# Altium PCB FEV-60_IO_Board.PcbDoc
Units mil, origin at the board's own origin, x right, y up, seen from the top; angles counter-clockwise.
Board outline 3285 x 2200 mil, 2 copper layers (Top Layer, Bottom Layer); 74 components, 86 nets, 279 pads, 88 vias.
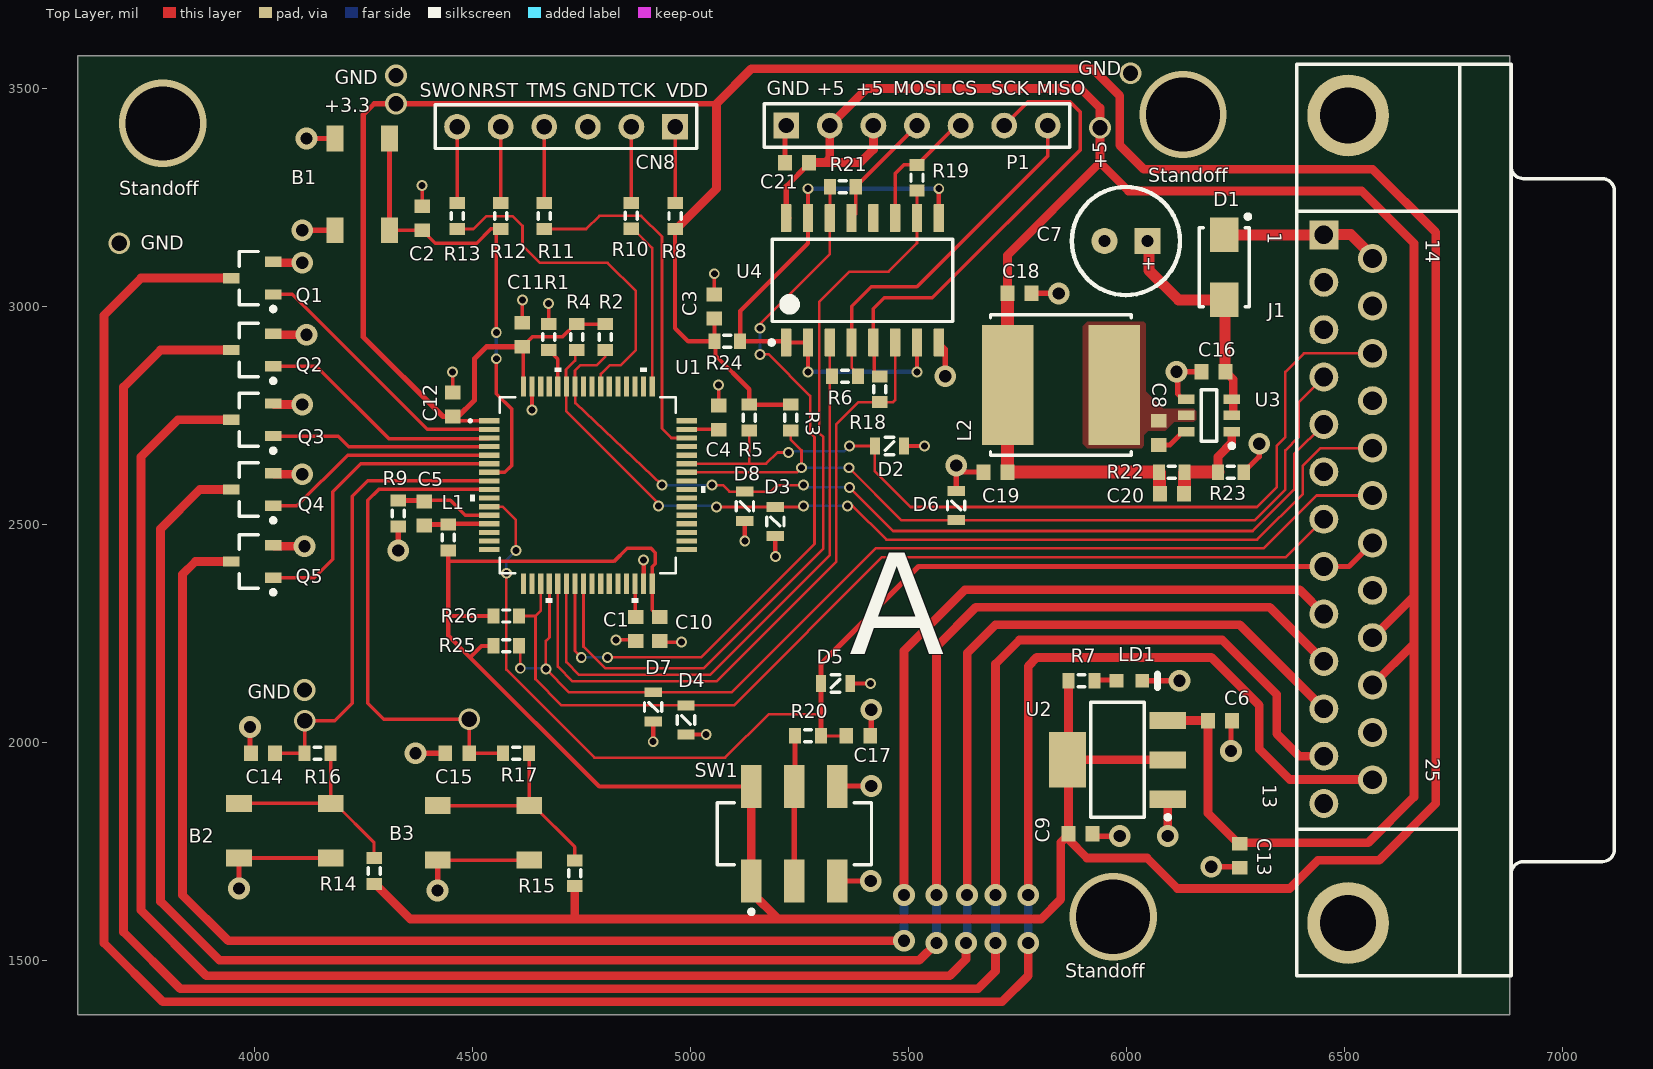
[diagram p0: Top Layer view]
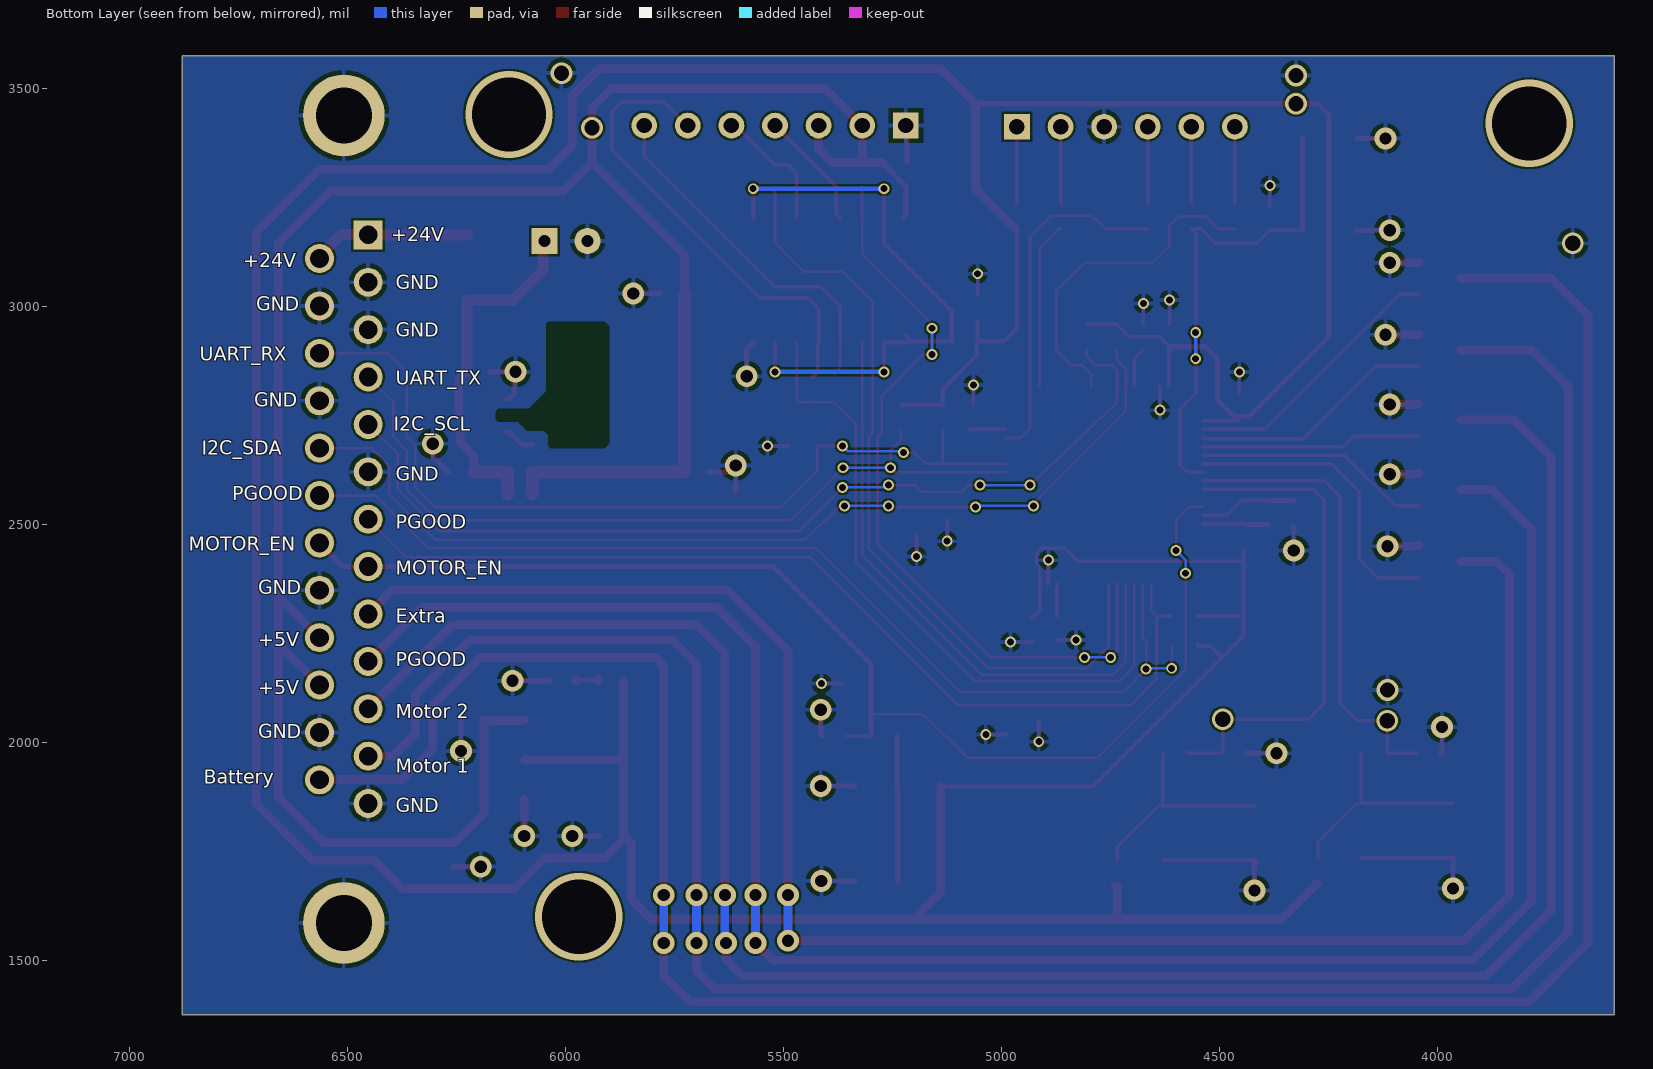
[diagram p1: Bottom Layer view, seen from below]

## Layer stack, top to bottom
Top Solder: solder mask 0.4, Solder Resist, Dk 3.5
Top Layer: signal copper 1.4
Dielectric 1: dielectric 12.6, FR-4, Dk 4.8
Bottom Layer: signal copper 1.4
Bottom Solder: solder mask 0.4, Solder Resist, Dk 3.5

## Board outline
3595,1375 3595,3575 6880,3575 6880,1375

## Design rules (kind name [scope] priority, off if disabled: settings)
Clearance [All] p1: gap=5 ignorepadtopadclearanceinfootprint=FALSE
HoleSize [All] p1: absolutevalues=TRUE maxlimit=180 minlimit=1 maxpercent=80.000 minpercent=20.000
MinimumSolderMaskSliver [All] p1: minsoldermaskwidth=5
PolygonConnect PolygonConnect_1 [All vs IsNamedPolygon('NETC8_1_L01_P004')] p1: connectstyle=Direct reliefconductorwidth=10 reliefentries=4 polygonreliefangle="90 Angle" airgapwidth=10
PolygonConnect [All] p2: connectstyle=Relief reliefconductorwidth=10 reliefentries=4 polygonreliefangle="90 Angle" airgapwidth=10
RoutingVias [All] p1: holewidth=28 width=50 viastyle="Through Hole" minholewidth=16 minwidth=25 maxholewidth=200 maxwidth=250
SilkToSilkClearance [All] p1: silktosilkclearance=4
SilkToSolderMaskClearance [IsPad] p1: minsilkscreentomaskgap=3 clearancetoexposedcopper=TRUE
SolderMaskExpansion [All] p1: expansion=4
Width [All] p1: maxlimit=30 minlimit=6 preferedwidth=10
26 further rules are at their usual default settings.

## Components (designator, comment, footprint, x,y, rotation, side; value= is the part's Value field where it differs from the comment)
B1 "TD-0341 [RESET/Black]" Button 4185,3175 r90 top
B2 "TD-0341 [RESET/Black]" Button 3965,1860 r0 top
B3 "TD-0341 [RESET/Black]" Button 4420.47,1855 r0 top
C1 "Cap Semi" 1608[0603] 4875,2260 r90 top value=4.7uF
C2 "Cap Semi" 1608[0603] 4385,3202.44 r270 top value=100nF
C3 "Cap Semi" 1608[0603] 5055,3000 r270 top value=22uF
C4 "Cap Semi" 1608[0603] 5065,2745 r270 top value=2.2uF
C5 "Cap Semi" 1608[0603] 4390,2525 r270 top value=10uF
C6 "Cap Semi" 1608[0603] 6215,2050 r180 top value=10uF
C7 "UVY1V101MED1TD" UVY1V101MED1TD 6030,3150 r180 top value=100uF
C8 "Cap Semi" 1608[0603] 6075,2710 r270 top value=100nF
C9 "Cap Semi" 1608[0603] 5895,1790 r180 top value=10uF
C10 "Cap Semi" 1608[0603] 4930,2260 r90 top value=22uF
C11 "Cap Semi" 1608[0603] 4615,2935 r270 top value=22uF
C12 "Cap Semi" 1608[0603] 4455,2775 r270 top value=22uF
C13 "Cap Semi" 1608[0603] 6260,1740 r90 top value=10uF
C14 "Cap Semi" 1608[0603] 4020,1975 r0 top value=0.1uF
C15 "Cap Semi" 1608[0603] 4465.47,1975 r0 top value=0.1uF
C16 "Cap Semi" 1608[0603] 6200,2850 r0 top value=4.7uF
C17 "Cap Semi" 1608[0603] 5385,2015 r180 top value=0.1uF
C18 "Cap Semi" 1608[0603] 5755,3030 r180 top value=10uF
C19 "Cap Semi" 1608[0603] 5700,2620 r0 top value=10uF
C20 "Cap Semi" 1608[0603] 6105,2570 r180 top value=47pF
C21 "Cap Semi" 1608[0603] 5245,3330 r0 top value=10uF
CN8 "Header 6X1" HDR1X6 4965,3412.26 r180 top
D1 "STPS2L30A" STPS2L30A 6225,3090 r270 top
D2 "SP1103C-01UTG" SP1103C-01UTG 5456.93,2680 r180 top
D3 "SP1103C-01UTG" SP1103C-01UTG 5195,2506.54 r90 top
D4 "SP1103C-01UTG" SP1103C-01UTG 4990,2051.54 r90 top
D5 "SP1103C-01UTG" SP1103C-01UTG 5333.46,2135 r180 top
D6 "SP1103C-01UTG" SP1103C-01UTG 5610,2543.46 r270 top
D7 "SP1103C-01UTG" SP1103C-01UTG 4915,2081.54 r90 top
D8 "SP1103C-01UTG" SP1103C-01UTG 5125,2541.54 r90 top
J1 "D Connector 25" DSUB1.385-2H25A 6883.11,2511.95 r270 top locked
L1 "Ferrite" J1-0603 4445,2470 r90 top
L2 "Inductor" 74404084100 5850,2820 r180 top value=10uH
LD1 "HSMS-C190" AVAG-HSMX-C190_V 6007.13,2141.22 r0 top
P1 "Header 7" HDR1X7 5220,3415 r0 top
Q1 "MOSFET-N" RK7002BMT116 3995,3065 r180 top
Q2 "MOSFET-N" RK7002BMT116 3995,2900 r180 top
Q3 "MOSFET-N" RK7002BMT116 3995,2740 r180 top
Q4 "MOSFET-N" RK7002BMT116 3995,2580 r180 top
Q5 "MOSFET-N" RK7002BMT116 3995,2415 r180 top
R1 "Res3" J1-0603 4675,2930 r270 top value=10K
R2 "Res3" J1-0603 4805,2930 r90 top value=10K
R3 "Res3" J1-0603 5230,2745 r90 top value=10K
R4 "Res3" J1-0603 4740,2930 r90 top value=10K
R5 "Res3" J1-0603 5135,2745 r90 top value=10K
R6 "Res3" J1-0603 5355,2840 r180 top value=0
R7 "Res3" J1-0603 5897.13,2141.22 r180 top value=1K
R8 "Res3" J1-0603 4965,3207.26 r270 top value=0
R9 "Res3" J1-0603 4330,2525 r90 top value=0
R10 "Res3" J1-0603 4865,3207.74 r270 top value=22
R11 "Res3" J1-0603 4665,3207.26 r270 top value=22
R12 "Res3" J1-0603 4565,3207.26 r270 top value=22
R13 "Res3" J1-0603 4465,3207.26 r270 top value=22
R14 "Res3" J1-0603 4275,1705 r270 top value=10K
R15 "Res3" J1-0603 4735,1700 r270 top value=10K
R16 "Res3" J1-0603 4145,1975 r0 top value=10K
R17 "Res3" J1-0603 4600.47,1975 r0 top value=10K
R18 "Res3" J1-0603 5435,2810 r270 top value=0
R19 "Res3" J1-0603 5520,3295 r270 top value=0
R20 "Res3" J1-0603 5270,2015 r0 top value=10K
R21 "Res3" J1-0603 5350,3275 r180 top value=0
R22 "Res3" J1-0603 6104.53,2620 r0 top value=158K
R23 "Res3" J1-0603 6240,2620 r0 top value=30.1K
R24 "Res3" J1-0603 5085,2920 r180 top value=0
R25 "Res3" J1-0603 4578,2222 r180 top value=10K
R26 "Res3" J1-0603 4578,2290 r180 top value=10K
SW1 "JS202011SCQN" CKCP-JS202011SCQN-6_V 5238.56,1790.49 r0 top
U1 "MCU_LQFP64" STM32F030R8 4765,2590 r0 top locked
U2 "LD1117S33TR" LD1117S33TR 5980,1960 r180 top
U3 "AP63301WU-7" AP63301WU-7 6190,2750 r180 top
U4 "CD40109BNSR" NS0016A_N 5395,3060 r90 top

## Footprints (in the part's own frame and the unit in brackets; to place one, negate y for a bottom-side part, rotate by r counter-clockwise, add the part's x,y. Pads: shape width x height; smd on the part's side, far side on the other; paste and mask are expansions set on the pad)
1608[0603] [mm] "Chip Capacitor, Body 1.6x0.8mm, IPC High Density"
  rect 0.8x0.9 smd: 1(-0.7,0) 2(0.7,0)
  body extent -0.87,-0.48 0.87,0.48, height 1.3
74404084100 [mm] "10µH Shielded Wirewound Inductor 3.3A 29mOhm Nonstandard"
  rect 3x7 smd: 1(-3.1,0) 2(3.1,0)
  silkscreen extent -4.1,-4.1 4.1,4.1, body extent -4.1,-4.1 4.1,4.1, height 4.2
AP63301WU-7 [mm] "Buck Switching Regulator IC Positive Adjustable 0.8V 1 Output 3A SOT-23-6 Thin, TSOT-23-6"
  rect 0.95x0.55 smd: 1(-1.325,0.95) 2(-1.325,0) 3(-1.325,-0.95) 4(1.325,-0.95) 5(1.325,0) 6(1.325,0.95)
  silkscreen extent -1.45,-1.5 0.45,1.9, body extent -1.4,-1.5 1.4,1.5, height 1.1
AVAG-HSMX-C190_V [mm] "SMD, 2-Leads, Body 1.6x0.8mm, Height 0.9mm"
  rect 0.8x0.8 smd: 1(-0.75,0) 2(0.75,0)
  silkscreen extent 1.65,-0.4 1.65,0.4, body extent -0.8,-0.4 0.8,0.4, height 0.9
Button [mm]
  rect 1.5x1 smd: 1(0,0) 2(0,-3.175) 3(5.334,-3.175) 4(5.334,0)
CKCP-JS202011SCQN-6_V [mm] "SMD, 6-Leads, Body 9x3.6mm, Pitch 2.5mm"
  rect 1.2x2.5 smd: 1(-2.5,-2.75) 2(0,-2.75) 3(2.5,-2.75) 4(-2.5,2.75) 5(0,2.75) 6(2.5,2.75)
  silkscreen extent -4.5,-4.67 4.5,1.8, body extent -4.5,-1.8 4.5,1.8, height 5.5
DSUB1.385-2H25A [mm] "Connector; D Subminiature; 25 Position; Right Angle; Pitch 1.385 mm"
  rect 1.69x1.69 hole 1.09: 1(-16.566,-10.92)
  round 1.69 hole 1.09: 2(-13.805,-10.92) 3(-11.044,-10.92) 4(-8.283,-10.92) 5(-5.522,-10.92) 6(-2.761,-10.92) 7(0,-10.92) 8(2.761,-10.92) 9(5.522,-10.92) 10(8.283,-10.92) 11(11.044,-10.92) 12(13.805,-10.92) 13(16.566,-10.92) 14(-15.185,-8.08) 15(-12.424,-8.08) 16(-9.663,-8.08) 17(-6.902,-8.08) 18(-4.141,-8.08) 19(-1.38,-8.08) 20(1.381,-8.08) 21(4.142,-8.08) 22(6.903,-8.08) 23(9.664,-8.08) 24(12.425,-8.08) 25(15.186,-8.08)
  round 4.76 hole 3.26: 26(-23.526,-9.5) 27(23.526,-9.5)
  silkscreen extent -26.5,-12.5 26.6,6
HDR1X6 [mm] "Connector; Header; 6 Position"
  rect 1.5x1.5 hole 0.9: 1(0,0)
  round 1.5 hole 0.9: 2(2.54,0) 3(5.08,0) 4(7.62,0) 5(10.16,0) 6(12.7,0)
  silkscreen extent -1.27,-1.27 13.97,1.27
HDR1X7 [mm] "Connector; Header; 7 Position"
  rect 1.5x1.5 hole 0.9: 1(0,0)
  round 1.5 hole 0.9: 2(2.54,0) 3(5.08,0) 4(7.62,0) 5(10.16,0) 6(12.7,0) 7(15.24,0)
  silkscreen extent -1.27,-1.27 16.51,1.27
J1-0603 [mm] "Chip Resistor, Body 1.6x0.8mm, IPC High Density"
  rect 0.7x0.9 smd: 1(-0.75,0) 2(0.75,0)
  silkscreen extent -0.2,-0.35 0.2,0.35, body extent -0.85,-0.48 0.85,0.48, height 0.9
LD1117S33TR [mm] "SOT223, LDO 3.3V Converter"
  rect 2.15x1 smd: 1(-2.925,2.3) 2(-2.925,0) 3(-2.925,-2.3)
  rect 2.15x3.25 smd: 4(2.925,0)
  silkscreen extent -3.05,-3.35 1.55,3.47, body extent -3.5,-3.35 3.5,3.35, height 1.8
NS0016A_N [mm] "SOIC,16-Leads,Body 10.5x5.6mm,Pitch 1.27mm,IPC Medium Density"
  rrect17% 1.65x0.6 smd: 1(-3.625,4.445) 2(-3.625,3.175) 3(-3.625,1.905) 4(-3.625,0.635) 5(-3.625,-0.635) 6(-3.625,-1.905) 7(-3.625,-3.175) 8(-3.625,-4.445) 9(3.625,-4.445) 10(3.625,-3.175) 11(3.625,-1.905) 12(3.625,-0.635) 13(3.625,0.635) 14(3.625,1.905) 15(3.625,3.175) 16(3.625,4.445)
  silkscreen extent -3.75,-5.25 2.4,5.42, body extent -2.8,-5.25 2.8,5.25, height 2
RK7002BMT116 [mm] "N-Channel 60V 250mA, Pitch 0.95mm, IPC Medium Density"
  rect 0.95x0.6 smd: 1(1.225,0) 2(-1.225,0.95) 3(-1.225,-0.95)
  silkscreen extent -1.35,-1.55 0.75,1.92, body extent -1.3,-1.55 1.3,1.55, height 1.1
SP1103C-01UTG [mm]
  rect 0.58x1 smd: 1(-0.85,0) 2(0.85,0)
  silkscreen extent -0.25,-0.51 0.25,0.51
STM32F030R8 [mil]
  rect 47x12 smd: 1(-226.38,147.64) 2(-226.38,127.95) 3(-226.38,108.27) 4(-226.38,88.58) 5(-226.38,68.9) 6(-226.38,49.21) 7(-226.38,29.53) 8(-226.38,9.84) 9(-226.38,-9.84) 10(-226.38,-29.53) 11(-226.38,-49.21) 12(-226.38,-68.9) 13(-226.38,-88.58) 14(-226.38,-108.27) 15(-226.38,-127.95) 16(-226.38,-147.64) 33(226.38,-147.64) 34(226.38,-127.95) 35(226.38,-108.27) 36(226.38,-88.58) 37(226.38,-68.9) 38(226.38,-49.21) 39(226.38,-29.53) 40(226.38,-9.84) 41(226.38,9.84) 42(226.38,29.53) 43(226.38,49.21) 44(226.38,68.9) 45(226.38,88.58) 46(226.38,108.27) 47(226.38,127.95) 48(226.38,147.64)
  rect 12x47 smd: 17(-147.64,-226.38) 18(-127.95,-226.38) 19(-108.27,-226.38) 20(-88.58,-226.38) 21(-68.9,-226.38) 22(-49.21,-226.38) 23(-29.53,-226.38) 24(-9.84,-226.38) 25(9.84,-226.38) 26(29.53,-226.38) 27(49.21,-226.38) 28(68.9,-226.38) 29(88.58,-226.38) 30(108.27,-226.38) 31(127.95,-226.38) 32(147.64,-226.38) 49(147.64,226.38) 50(127.95,226.38) 51(108.27,226.38) 52(88.58,226.38) 53(68.9,226.38) 54(49.21,226.38) 55(29.53,226.38) 56(9.84,226.38) 57(-9.84,226.38) 58(-29.53,226.38) 59(-49.21,226.38) 60(-68.9,226.38) 61(-88.58,226.38) 62(-108.27,226.38) 63(-127.95,226.38) 64(-147.64,226.38)
  silkscreen extent -273,-270 270,270, body extent -236,-236 236,236, height 63
STPS2L30A [mm] "SODFL, Shottkey Diode"
  rect 2x1.65 smd: 1(-1.9,0) 2(1.9,0)
  silkscreen extent -3.07,-1.45 2.3,1.5, body extent -2.54,-1.45 2.54,1.45, height 2.45
UVY1V101MED1TD [mil] "Radial Cap from Nichicon"
  rect 60x60 hole 28: 1(-18.43,0)
  round 60 hole 28: 2(80,0)
  silkscreen extent -93,-124 155,124

## Part data
B1 B2 B3: library part "SW PUSHBUTTON", "SE PUSHBUTTON"
C1 C2 C3 C4 C5 C6 C8 C9 C10 C11 C12 C13 C14 C15 C16 C17 C18 C19 C20 C21: "Capacitor (Semiconductor SIM Model)", LatestRevisionDate=29-May-2009, LatestRevisionNote="IPC-7351 Footprint Added.", PackageDescription="Chip Capacitor", PackageReference=C1206, Published=8-Jun-2000, Publisher="Altium Limited"
C7: "Polarized Capacitor (Axial)", LatestRevisionDate=17-Jul-2002, LatestRevisionNote="Re-released for DXP Platform.", PackageDescription="Polarized Capacitor; 2 Leads", PackageReference=POLAR0.8, Published=8-Jun-2000, Publisher="Altium Limited"
CN8: "Header, 6-Pin, Single row", LatestRevisionDate=17-Jul-2002, LatestRevisionNote="Re-released for DXP Platform.", Publisher="Altium Limited"
D1: Manuf_1=STM, Manuf_Part_1=BAT60JFILM, Distrib=ST, ECCN_US/EU=EAR99/NEC, Order=BAT60JFILM, Provided=ST, Revision="July-2002: Re-released for DXP Platform."
D2 D3 D4 D5 D6 D7 D8: "9V (Typ) Clamp 80A (8/20µs) Ipp Tvs Diode Surface Mount 2-DFN (1.6x1)", Manuf="Littelfuse Inc.", Package=0603/2-DFN, Distrib=Digi-Key, Manuf_Part_Num=SP1103C-01UTG, Order=F10154CT-ND, Purchase Link=https://www.digikey.com/product-detail/en/littelfuse-inc/SP1103C-01UTG/F10154CT-ND/7402659
J1: "Receptacle Assembly, 25 Position, Right Angle", PackageDocument=U, DatasheetDocument=19-Mar-1999, Gender=Receptacle, LatestRevisionDate=17-Jul-2002, LatestRevisionNote="Re-released for DXP Platform.", Orientation="Right Angle", PackageReference=787202, Positions=25, Published=15-Jun-2001, Publisher="Altium Limited"
L1: library part Res3, "Resistor", LatestRevisionDate=29-May-2009, LatestRevisionNote="IPC-7351 Footprint Added.", PackageDescription="Chip Resistor", PackageReference=J1-0603, Published=8-Jun-2000, Publisher="Altium Limited"
LD1: library part CMP-2000-06427-1, "LED Uni-Color Red, 52 mW, 20 mA, -40 to 85 degC, 2-Pin SMD, RoHS, Tape and Reel", Emitting Color=Red, Forward Current=25mA, Forward Voltage=2.6V, Manufacturer=Avago, Operating Temperature Classification=Industrial, Operating Temp Range=-40Cto85C, Package Description="2-Pin Surface Mount Device, Body 1.6 x 0.8 mm, Height 0.9 mm", Package Reference=HSMX-C190, Package Type=ChipLed, Power Dissipation=52W, Reverse Voltage=5V, Test Current (It)=20mA, Chip Material=GaP, Datasheet URL=http://docs.avagotech.com/docs/AV02-0551EN, Datasheet Version=03/2012, DELETED=Compliant, Dominant Wave Length=626nm, High Brightness=No, Lens Dimensions=1x0.8x0.5mm, Lens Type=ColorlessDiffused, Luminous Intensity=10mcd, Lum Intensity=10mcd, Main Category=ChipLED, Manufacturer URL=http://www.avagotech.com/, Mounting=SurfaceMount, Mounting Technology=SurfaceMount, Number of  Elements=1, Packaging=TapeandReel, Peak Wavelength=630nm, Pin Count=2, Product Depth (mm)=0.8mm, Product Height (mm)=0.8mm, Product Length (mm)=1.6mm, Rad Hardened=No, Shape Type=Rectangular, Type=Uni-Color, Viewing Angle=170deg
P1: "Header, 7-Pin", LatestRevisionDate=17-Jul-2002, LatestRevisionNote="Re-released for DXP Platform.", Publisher="Altium Limited"
Q1 Q2 Q3 Q4 Q5: "N-Channel MOSFET", LatestRevisionDate=17-Jul-2002, LatestRevisionNote="Re-released for DXP Platform.", PackageDescription="TO, Flat Index; 3 In-Line, Axial Leads; Body Dia. 4.6mm; Lead Dia. 0.5 mm (max)", PackageReference=E3, PackageVersion=1995/1996, Published=8-Jun-2000, Publisher="Altium Limited"
R1 R2 R3 R4 R5 R6 R7 R8 R9 R10 R11 R12 R13 R14 R15 R16 R17 R18 R19 R20 R21 R22 R23 R24 R25 R26: "Resistor", LatestRevisionDate=29-May-2009, LatestRevisionNote="IPC-7351 Footprint Added.", PackageDescription="Chip Resistor", PackageReference=J1-0603, Published=8-Jun-2000, Publisher="Altium Limited"
SW1: library part CMP-2000-05087-1, "Switch Slide DPDT, 0.3 A, 6 V, -40 to 85 degC, 6-Pin SMD, RoHS, Tape and Reel", Actuator Color=Black, Contact Rating @ Voltage=0.3@6VDCA, Dielectric Strength=500VAC, Manufacturer="C&K Components", Maximum AC Voltage Rating=N/A, Maximum Contact Resistance=70mOhm, Maximum DC Voltage Rating=6V, Minimum Insulation Resistance=100MOhm, Operating Temperature=-40to85C, Actuator Material=Nylon4/6, Actuator Style=TopSlide, Base Material=N/A, Body Orientation=Straight, Contact Material=CopperAlloy, Contact Plating=Silver, COO=US, Datasheet URL=http://datasheet.octopart.com/JS202011SCQN-C%26K-Components-datasheet-62100994.pdf, Datasheet Version=Sep-15, Dimension=9x7.5x5.5mm, ECCN=EAR99, Electrical Life=15000Cycles, Family=JS, Housing Material=Nylon4/6, HTS=8536509050, Manufacturer URL=http://www.ckswitches.com, Mechanical Life=N/A, Mounting=SurfaceMount,GullWing, Packaging=TapeandReel, Part No=JS202011SCQN, Pole Throw Configuration=DPDT, Product Weight=N/A, RoHS=Yes, Seal Description=N/A, Seal Location=N/A, Supplier=C&KComponents, Supplier Standard Pack=5,000, Switch Configuration=N/A, Type=Sub-Miniature
U2: library part LD1117
U3: "Buck Switching Regulator IC Positive Adjustable 0.8V 1 Output 3A SOT-23-6 Thin, TSOT-23-6", ComponentLink1Description=Digikey, ComponentLink1URL=https://www.digikey.com/product-detail/en/diodes-incorporated/AP63301WU-7/31-AP63301WU-7CT-ND/10492238
U4: library part CMP-1527-00005-2, "CMOS Quad Low-to-High Voltage Level Shifter, 3 to 18 V, -55 to 125 degC, 16-Pin SO (NS16), RoHS, Tape and Reel", Manufacturer="Texas Instruments", Package Reference=NS0016A, Temperature Range="-55 to 125 degC", ComponentLink1Description="Manufacturer URL", ComponentLink1URL=www.ti.com, ComponentLink2Description=Datasheet, ComponentLink2URL=http://www.ti.com/lit/ds/symlink/cd40109b.pdf, ComponentLink3Description="Package Specification", ComponentLink3URL=http://www.ti.com/lit/ml/msop002a/msop002a.pdf, DatasheetVersion=SCHS099B, Mounting Technology="Surface Mount", Number of Bits=4, Number of Channels=4, Number of Outputs=4, PackageDescription="16-Pin Plastic Small Outline Package, Body 10.2 x 5.3 mm, Pitch 1.27 mm", PackageVersion=4040062/C, Packing="Tape and Reel", PartNumber=CD40109BNSR, Propagation Delay="240 ns Max.", RoHS=TRUE, VSS="3 to 18 V"
L2: Code_IEC=1005, Code_JEITA=0402, LatestRevisionDate=29-May-2009, LatestRevisionNote="IPC-7351 Footprint Added.", PackageDescription="Chip Inductor", PackageReference=0402-A, Published=8-Jun-2000, Publisher="Altium Limited"

## Via types
v1: diameter 25, hole 16, Top Layer to Bottom Layer, 36 vias
v2: diameter 50, hole 28, Top Layer to Bottom Layer, 35 vias
v3: diameter 50, hole 35, Top Layer to Bottom Layer, 8 vias
v4: diameter 25, hole 16, Top Layer to Bottom Layer, tented both sides, 6 vias
v5: diameter 200, hole 170, Top Layer to Bottom Layer, 3 vias

## Nets (pads, with @x,y where several pads share a name; then routed paths per layer and width w, separated by ;. In a path a pad name is that pad's centre, name@x,y a point inside that pad or via, vN(x,y) a via of type N, cw(c..) or ccw(c..) an arc to the next point about the centre after c; other vN are vias at no path point)
+5: C6.2 C13.2 C18.2 C19.2 C20.2 C21.2 J1.22 J1.23 L2.2 P1.2 P1.3 R22.1 U2.3 U4.16 | length 5635.3
  Top Layer w12: U4.16@5225.81,3202.72 5220,3208.53 5220,3275.47 5272.56,3328.03 C21.2
  Top Layer w20: C21.2 5310,3330 ; P1.3 5420,3360 5390,3330 5310,3330 ; C18.2 5727.44,3117.44 5940,3330 ; U2.3 6095.43,2050.28 6187.17,2050.28 C6.2 6187.44,1837.56 6255,1770 6555,1770 6660,1875 6660,2226.5 ; J1.23 6660,2226.5 ; J1.22 6660,2335.2 ; 5310,3330 5320,3340 P1.2 5405,3500 5895,3500 5940,3455 v3(5940,3410) 5940,3330 ; 5940,3330 6005,3265 6540,3265 6660,3145 6660,2335.2 ; 6660,2226.5 6660,2335.2
  Top Layer w30: C18.2 5727.44,2820.51 L2.2 C19.2@5727.95,2620 ; C19.2 R22.1 6076.22,2618.78 6076.22,2573.19 6077.44,2571.97 C20.2
+24: D1.1 J1.1 J1.14 | length 366.5
  Top Layer w25: D1.1 6225.65,3164.15 J1.1 6454.04,3165 6515,3165 6565,3115 J1.14
AGND: C5.1 R9.2 U1.12 | length 223
  Top Layer w8: C5.1@4390,2555.12 4449.88,2555.12 4483.9,2521.1 U1.12
  Top Layer w12: R9.2 4330.3,2554.82 4389.7,2554.82 C5.1@4390,2555.12
AVDD: C5.2 L1.2 U1.13 | length 149.6
  Top Layer w8: L1.2 L1.2@4446.89,2501.42
  Top Layer w10: L1.2@4446.89,2501.42 U1.13
  Top Layer w12: C5.2@4390,2500 4390.24,2499.76 4444.76,2499.76 L1.2
BATTERY: J1.25 Q1.1 | length 5651
  Top Layer w20: Q1.1 3740,3065 3655,2980 3655,1540 3790,1405 5715,1405 5775,1465 v2(5775,1540) ; v2(5775,1650) 5775,2175 5795,2195 6195,2195 6305,2085 6305,1985 6375,1915 6564.09,1915 J1.25
  Bottom Layer w20: v2(5775,1540) v2(5775,1650)
BOOT0: R1.2 U1.60 | length 92.8
  Top Layer w7: R1.2 R1.2@4676.1,2899.37
  Top Layer w8: R1.2@4676.1,2899.37 4696.1,2879.37 U1.60
CS: P1.5 R19.1 U4.11 | length 297.8
  Top Layer w8: U4.11 5470,3305 5489.53,3324.53 R19.1 5610.47,3415 P1.5
EXTRA: J1.9 Q5.1 | length 4266.8
  Top Layer w20: Q5.1 3865,2415 3835,2385 3835,1650 3940,1545 v2(5490,1545) ; v2(5490,1650) 5490,2210 5630,2350 6397.74,2350 J1.9
  Bottom Layer w20: v2(5490,1545) v2(5490,1650)
FB: C20.1 R22.2 R23.1 U3.1 | length 232.8
  Top Layer w20: R23.1 6210.47,2655.47 6242.17,2687.17 U3.1
  Top Layer w30: C20.1 6133.31,2570.75 6133.31,2615 6133.31,2619.25 R22.2 R23.1
GND: B1.1 B1.4 B2.2 B2.3 B3.2 B3.3 C1.1 C2.1 C3.1 C4.1 C6.1 C7.2 C9.1 C10.1 C11.1 C12.1 C13.1 C14.1 C15.1 C16.1 C17.1 C18.1 C19.1 C21.1 CN8.3 D2.1 D3.1 D4.1 D5.1 D6.1 D7.1 D8.1 J1.2 J1.3 J1.6 J1.13 J1.15 J1.17 J1.21 J1.24 J1.26 J1.27 LD1.2 P1.1 Q1.3 Q2.3 Q3.3 Q4.3 Q5.3 R1.1 R9.1 R23.2 SW1.3 SW1.6 U1.31 U1.63 U2.1 U3.4 U4.8 | length 3167
  Top Layer w8: C2.1 v1(4385,3277.44) ; B3.2 B3.3 ; C12.1 v1(4455,2850) ; C11.1@4615,2957.56 v1(4615,3015) ; R1.1 v1(4675,3006.97) ; v1(4830,2235) 4872.44,2235 C1.1 ; C10.1 4932.44,2230 v1(4980,2230) ; C3.1 v1(5055,3075) ; C4.1 v1(5065,2820)
  Top Layer w10: B2.2 B2.3 ; v4(4637.05,2762.05) U1.63 ; U1.31 v4(4892.95,2417.95) ; v1(4915,2001.54) D7.1 ; D4.1 v1(5036.54,2018.07) ; v1(5125,2461.54) D8.1 ; v1(5195,2426.54) D3.1 ; D5.1 v1(5413.46,2135) ; D2.1 v1(5536.93,2680)
  Top Layer w12: v2(3965,1665) B2.2 ; v2(3990,2035) 3990,1977.44 C14.1 ; v2(4110,3175) B1.1 ; v2(4120,3385) B1.4 ; v2(4330,2440) R9.1 ; v2(4370,1975) C15.1 ; B3.2@4415,1724.53 B3.2 v2(4420.47,1660) ; C21.1 P1.1@5217.44,3412.44 ; SW1.3 v2(5413.76,1682.22) ; SW1.6 5338.23,1900 v2(5415,1900) ; C17.1 5415,2017.44 v2(5415,2075) ; U4.8 5585,2902.28 v2(5585,2840) ; D6.1 v2(5610,2635) 5625,2620 C19.1 ; C18.1 v2(5845,3030) ; C9.1@5922.56,1785 v2(5985,1785) ; LD1.2@6037.87,2142.44 LD1.2 v2@6107.12,2141.22 ; U2.1@6095,1869.29 U2.1 ; U3.4 6129.96,2787.4 6118.24,2799.13 6118.24,2846.76 v2(6115,2850) C16.1 ; v2(6195,1715) 6257.44,1715 C13.1 ; v2(6240,1980) 6240,2047.44 C6.1 ; R23.2 6305,2655.47 v2(6305,2685)
  Top Layer w20: Q5.3 4045.63,2450 v2(4115,2450) ; Q4.3 4045.63,2615 v2(4110,2615) ; Q3.3 4045.63,2775 v2(4110,2775) ; Q2.3 4045.63,2935 v2(4120,2935) ; Q1.3 4045.63,3100 v2(4110,3100) ; v2(6095,1785) U2.1@6095,1869.29
  other v2: 6122.13,2141.22
  other v3: 4115,2120 3690,3145 4325,3530 6010,3535
I2C1_SCL: D8.2 J1.5 R2.1 U1.58 | length 2169.5
  Top Layer w6: R2.1 4805,2885 4785,2865 4747.34,2865 4735.47,2853.14 U1.58 4736.47,2778.35 v4(4935,2590) ; v1(5050,2590) 5075,2590 5090,2575 D8.2 5185,2575 5200,2590 v1(5260,2590) ; v1(5365,2585) 5465,2485 6290,2485 6385,2580 6385,2661.16 J1.5
  Bottom Layer w6: v4(4935,2590) v1(5050,2590) ; v1(5260,2590) 5265,2585 v1(5365,2585)
I2C1_SDA: D3.2 J1.18 R4.1 U1.59 | length 2265
  Top Layer w6: R4.1 4736.06,2900.47 4736.06,2876.06 4715,2855 4715,2817.17 U1.59 4715.79,2759.21 4927.38,2547.62 v4(4927.38,2542.5) ; v1(5060,2540) D3.2 5257.5,2540 v1(5260,2542.5) ; v1(5360.62,2542.5) 5372.5,2542.5 5450,2465 6300,2465 6405,2570 6405,2635 6445,2675 J1.18
  Bottom Layer w6: v4(4927.38,2542.5) 5057.5,2542.5 v1(5060,2540) ; v1@5255,2550 5260,2545 v1(5260,2542.5) v1(5360.62,2542.5)
MISO: P1.7 R6.1 U4.4 | length 823.9
  Top Layer w6: U4.4 5370,2859.53 R6.1@5384.53,2845
  Top Layer w8: U4.4 5370,3000 5415,3045 5520,3045 5820,3345 P1.7
MOSI: P1.4 R21.1 U4.13 | length 274.4
  Top Layer w8: U4.13 5380,3212.72 5380,3275 P1.4
MOTOR_1: J1.12 Q2.1 | length 5246.5
  Top Layer w20: Q2.1 3785,2900 3700,2815 3700,1565 3830,1435 5660,1435 5700,1475 v2(5700,1540) ; v2(5700,1650) 5700,2180 5755,2235 6220,2235 6345,2110 6345,2020 6396.56,1968.44 J1.12
  Bottom Layer w20: v2(5700,1540) v2(5700,1650)
MOTOR_2: J1.11 Q3.1 | length 4880.7
  Top Layer w20: Q3.1 3825,2740 3740,2655 3740,1615 3890,1465 5595,1465 5632.5,1502.5 v2(5632.5,1540) ; v2(5635,1650) 5635,2205 5700,2270 6260.33,2270 J1.11
  Bottom Layer w20: v2(5632.5,1540) 5635,1542.5 v2(5635,1650)
MOTOR_EN: C17.2 D5.2 J1.8 J1.20 R20.2 U1.11 | length 2871.8
  Top Layer w6: U1.11 4569.21,2540.79 4600,2510 v4(4600,2440) ; v4(4578,2388) 4578,2167 4780,1965 5080,1965 5180,2065 5299.53,2065
  Top Layer w7: R20.2@5303.46,2015 C17.2
  Top Layer w12: R20.2 5299.53,2065 ; 5300,2065 D5.2 5300,2180 5523.25,2403.25 J1.8 6510.65,2403.25 J1.20
  Bottom Layer w6: v4(4578,2388) 4578,2418 v4(4600,2440)
NetB2_1: B2.1 B2.4 R14.1 R16.2 | length 497.9
  Top Layer w7: R16.2 R16.2@4175,1974.53 ; B2.4 4184.84,1860 4275,1769.84 R14.1
  Top Layer w8: B2.1 B2.4 R16.2@4175,1974.53
NetB3_1: B3.1 B3.4 R15.1 R17.2 | length 504.7
  Top Layer w7: R17.2 R17.2@4630.47,1974.53 ; B3.4 4640.31,1855 4735,1760.31 R15.1
  Top Layer w8: B3.1 B3.4 R17.2@4630.47,1974.53
NetC7_1: C7.1 C16.2 D1.2 U3.2 U3.3 | length 543.1
  Top Layer w20: C16.2 6245.12,2832.44 U3.2@6245.12,2750
  Top Layer w25: C7.1 6052.5,3145.93 6052.5,3082.5 6119.8,3015.2 D1.2 6226.28,3013.92 6226.28,2851.28 C16.2
NetC8_1: C8.1 L2.1 U3.5
NetC8_2: C8.2 U3.6 | length 75.3
  Top Layer w12: C8.2 6099.8,2682.44 6129.96,2712.6 U3.6
NetCN8_1: CN8.1 R8.1 | length 175.5
  Top Layer w8: R8.1 CN8.1
NetCN8_2: CN8.2 R10.1 | length 175
  Top Layer w8: R10.1 CN8.2
NetCN8_4: CN8.4 R11.1 | length 175.5
  Top Layer w8: R11.1 CN8.4
NetCN8_5: CN8.5 R12.1 | length 175.5
  Top Layer w8: R12.1 CN8.5
NetCN8_6: CN8.6 R13.1 | length 175.5
  Top Layer w8: R13.1 CN8.6
NetLD1_1: LD1.1 R7.1 | length 56.3
  Top Layer w12: R7.1@5924.76,2143.11 LD1.1@5975.71,2143.11
  Top Layer w20: R7.1@5924.76,2143.11 R7.1 ; LD1.1@5975.71,2143.11 LD1.1
NetR20_1: R20.1 SW1.2 SW1.5 | length 333.6
  Top Layer w12: SW1.2 SW1.5 5240.47,1900.67 R20.1
NRST: B1.2 B1.3 C2.2 R12.2 U1.7 | length 1110.1
  Top Layer w8: B1.2 4384.88,3175 C2.2 4414.88,3145 4510,3145 4542.74,3177.74 R12.2@4564.78,3177.74 ; U1.7 4574.53,2619.53 4590,2635 4590,2765 4555,2800 v1(4555,2880) ; v1(4555,2940) 4555,3167.96 R12.2@4564.78,3177.74 ; R12.2 R12.2@4564.78,3177.74
  Top Layer w12: B1.2 B1.3
  Bottom Layer w8: v1(4555,2880) v1(4555,2940)
PA0: U1.14
PA1: U1.15
PA2: U1.16
PA3: U1.17
PA4: D7.2 J1.19 R25.1 U1.20 | length 2416.4
  Top Layer w6: R25.1 4610,2219.53 v1(4610,2170) ; U1.20 4677,2363.04 4677,2241 4668.62,2232.62 v1(4668.62,2168.62) 4722.25,2115 5095,2115 5425,2445 6315,2445 6436.3,2566.3 J1.19
  Bottom Layer w6: v1(4610,2170) 4667.25,2170 v1(4668.62,2168.62)
PA5: R18.2 U1.21 U4.6 | length 1560.2
  Top Layer w6: U1.21 4696.1,2173.9 4730,2140 5060,2140 5335,2415 5335,2730 5385,2780 5429.53,2780 R18.2@5432.5,2782.97 ; R18.2 5465.47,2780.47 5470,2785 U4.6
PA6: R6.2 U1.22 U4.3 | length 1396.9
  Top Layer w6: U1.22 4715.79,2184.21 4745,2155 5045,2155 5320,2430 5320,2845 U4.3
PA7: R21.2 U1.23 U4.14 | length 1767.3
  Top Layer w6: U1.23 4735.47,2209.53 v1(4750,2195) ; v1(4810,2195) 5025,2195 5285,2455 5285,2700 5275,2710 5275,2795 5180,2890 v1(5160,2890) ; v1(5160,2950) 5160,2960 5320,3120 U4.14 5320.47,3203.19 R21.2
  Bottom Layer w6: v1(4750,2195) v1(4810,2195) ; v1(5160,2890) v1(5160,2950)
PA8: U1.41
PA11: U1.44
PA12: U1.45
PA15: U1.50
PB0: U1.26
PB1: U1.27
PB2: U1.28
PB3: R13.2 U1.55 | length 786.5
  Top Layer w6: R13.2 4502.74,3177.74 4532.26,3207.26 4592.74,3207.26 4615,3185 4615,3140 4655,3100 4810,3100 4875,3035 4875,2900 4840,2865 4815,2865 4795,2845 4795,2816.85 U1.55
PB4: U1.56
PB5: U1.57
PB8: U1.61
PB9: U1.62
PB10: U1.29
PB11: C1.2 U1.30 | length 76.8
  Top Layer w7: C1.2@4873.27,2289.29 C1.2
  Top Layer w8: C1.2@4873.27,2289.29 U1.30
PB12: U1.33
PB13: U1.34
PB14: U1.35
PB15: U1.36
PC0: C14.2 R16.1 U1.8 | length 1071.8
  Top Layer w8: C14.2 R16.1 v3(4115.47,2049.53) 4184.53,2049.53 4225,2090 4225,2565 4259.84,2599.84 U1.8
PC1: C15.2 R17.1 U1.9 | length 1163.9
  Top Layer w8: U1.9 4285.16,2580.16 4260.16,2555.16 4260.16,2089.84 4296.97,2053.03 v3(4493.03,2053.03) C15.2 R17.1 R17.1@4575,1979.06
PC2: U1.10
PC4: R19.2 U1.24 U4.10 | length 1797.9
  Top Layer w6: U1.24 4755.16,2219.84 4805,2170 5030,2170 5305,2445 5305,2700 5296,2709 5296,3011 5365,3080 5455,3080 5520,3145 U4.10 R19.2
PC5: U1.25
PC6: U1.37
PC7: U1.38
PC8: U1.39
PC9: U1.40
PC10: U1.51
PC11: U1.52
PC12: U1.53
PC13: Q1.2 U1.2 | length 623.7
  Top Layer w8: Q1.2 4087.4,3027.6 4397.05,2717.95 U1.2
PC14: Q2.2 U1.3 | length 564.5
  Top Layer w8: Q2.2 4142.4,2862.6 4308,2697 4537.35,2697 U1.3
PC15: Q3.2 U1.4 | length 505.3
  Top Layer w8: Q3.2 4192.4,2702.6 4216.42,2678.58 U1.4
PD2: U1.54
PF0: Q4.2 U1.5 | length 543.6
  Top Layer w8: Q4.2 4097.6,2542.6 4213.9,2658.9 U1.5
PF1: Q5.2 U1.6 | length 694.6
  Top Layer w8: Q5.2 4137.6,2377.6 4180,2420 4180,2575 4244.21,2639.21 U1.6
PF4: U1.18
PF5: D4.2 J1.7 R26.1 U1.19 | length 2268.8
  Top Layer w6: R26.1@4609.53,2290 4645,2290 ; U1.19 4656.73,2301.73 4645,2290 ; J1.7 6366.24,2425 5440,2425 5100,2085 D4.2 4705,2085 4645,2145 4645,2290
PF6: C4.2 U1.47 | length 83.8
  Top Layer w8: U1.47 5064.49,2717.95 C4.2 C4.2@5075,2717.44
PF7: U1.48
PGOOD: J1.10 Q4.1 | length 4563.4
  Top Layer w20: Q4.1 3875,2580 3785,2490 3785,1635 3920,1500 5525,1500 v2(5565,1540) ; v2(5565,1650) 5565,2220 5655,2310 6329.04,2310 J1.10
  Bottom Layer w20: v2(5565,1540) v2(5565,1650)
SCK: P1.6 R18.1 U4.5 | length 1083.4
  Top Layer w8: R18.1 5431.06,2839.53 5422.28,2848.31 5422.28,2915 U4.5 5420,2995 5445,3020 5555.17,3020 5895,3359.83 5895,3445 5870,3470 5775,3470 P1.6
TCK: R10.2 U1.49 | length 383.9
  Top Layer w6: R10.2 4868.94,3178.21 4912.64,3134.51 U1.49
TMS: R11.2 U1.46 | length 807.6
  Top Layer w6: R11.2 4761.32,3177.74 4791.32,3207.74 4887.26,3207.74 4935,3160 4935,2720 4956.73,2698.27 U1.46
USART_RX: D2.2 J1.16 R5.1 U1.43 | length 2048.5
  Top Layer w6: U1.43 5135,2639.21 ; R5.1 5135,2639.21 ; v1(5225,2665) 5200,2665 5174.21,2639.21 5135,2639.21 ; v1(5365,2680) D2.2 5423.46,2621.54 5505,2540 6300,2540 6345,2585 6345,2680 6365,2700 6365,2850 6407.4,2892.4 J1.16
  Bottom Layer w6: v1(5225,2665) 5227.5,2667.5 5352.5,2667.5 v1(5365,2680)
USART_TX: D6.2 J1.4 R3.1 U1.42 | length 1847.1
  Top Layer w6: U1.42 5244.53,2619.53 v1(5255,2630) 5255,2670 5230,2695 R3.1 ; v1(5363.87,2630) 5483.87,2510 6295,2510 6365,2580 6365,2670 6395,2700 6395,2779.86 J1.4
  Bottom Layer w6: v1(5255,2630) v1(5363.87,2630)
VDD: C3.2 C9.2 C10.2 C11.2 C12.2 L1.1 R2.2 R3.2 R4.2 R5.2 R7.2 R8.2 R14.2 R15.2 R24.2 R25.2 R26.2 SW1.1 SW1.4 U1.1 U1.32 U1.64 U2.2 U2.4 | length 12093.2
  Top Layer w7: C10.2@4928.03,2287.56 C10.2
  Top Layer w8: 4445,2415 4825,2415 4855,2445 4910,2445 4920,2435 4920,2410 4912.64,2402.64 U1.32 4912.64,2302.95 C10.2@4928.03,2287.56 ; C12.2@4455,2737.44 4538.43,2737.44 U1.1 ; C11.2 4637.56,2930 4706.54,2930 4736.06,2959.53 R4.2 R2.2 ; U1.64 C11.2@4617.36,2899.8
  Top Layer w10: L1.1 4445,2415 4445,2290 ; R25.2@4550.47,2225 4550.47,2221.06 4521.06,2221.06 4495,2195 ; R26.2@4550.47,2290 R26.2 4445,2290 ; C11.2@4610.39,2899.8 C11.2@4617.36,2899.8 ; C10.2 C10.2@4931.97,2287.56 ; R8.2 4965,2950 4995,2920 R24.2 ; R8.2@4968.34,3178.34 R8.2@4968.94,3177.74 ; C3.2@5055,2965 5055.47,2964.53 R24.2 ; SW1.4 4791.24,1898.76 4495,2195 ; R3.2 R5.2 5135,2810 5057.72,2887.28 5057.72,2917.76 R24.2 ; 4445,2290 4445,2245 4495,2195
  Top Layer w12: C11.2 4532.44,2907.44 4505,2880 4505,2785 4467.44,2747.44 C12.2 4432.56,2747.44 4250,2930 4250,3440 4275,3465 v3(4325,3465) 5060,3465 ; R8.2 R8.2@4968.94,3177.74
  Top Layer w20: R14.2 R14.2@4276.97,1675.47 ; R14.2@4278.94,1675.47 R14.2@4276.97,1675.47 ; 4735,1595 R15.2 R15.2@4738.94,1670.47 ; R8.2@4968.34,3178.34 5060,3270 5060,3465 5140,3545 5923.28,3545 5985,3483.28 5985,3370 6040,3315 6565,3315 6710,3170 6710,1860 6580,1730 6440,1730 6375,1665 6117.74,1665 6047.74,1735 5910,1735 5867.44,1777.56 C9.2@5867.44,1788.03 ; SW1.4 SW1.1 5140.14,1656.63 5201.77,1595 ; R7.2 5867.6,1962.76 U2.4 ; U2.2 U2.4 ; R14.2@4276.97,1675.47 4357.44,1595 4615,1595 5201.77,1595 ; 5201.77,1595 5805,1595 5850,1640 5850,1770.59 C9.2@5867.44,1788.03 ; U2.4 5867.44,1957.4 C9.2 C9.2@5867.44,1788.03
VLEVEL: R24.1 U4.1 U4.2 U4.7 U4.9 U4.15 | length 1332.5
  Top Layer w10: U4.1@5213.19,2926.81 U4.1@5220,2933.62 ; v1(5270,2850) U4.2 U4.1 5217.28,2920 R24.1 5114.53,2989.53 5270,3145 U4.15 v1(5270,3270) ; v1(5520,2850) U4.7 ; U4.9 v1(5570,3270)
  Bottom Layer w10: v1(5270,2850) v1(5520,2850) ; v1(5270,3270) v1(5570,3270)
pads on no net: U4.12
copper on no net:
  other v5: 5970,1600 3790,3420 6130,3440

## Polygon pours and split planes (outlines as drawn)
NetC8_1 on Top Layer "NETC8_1_L01_P004" (solid, pour order 6): 6155,2735 6160,2740 6160,2760 6155,2765 6085,2765 6045,2805 6045,2960 6040,2965 5910,2965 5900,2955 5900,2685 5910,2675 6035,2675 6040,2680 6040,2705 6050,2715 6090,2715 6110,2735
GND on Bottom Layer "Bottom Layer-GND" (solid, pour order 8): 3595,1375 6880,1375 6880,3575 3595,3575

## Other copper
Bottom Layer:
  pour cut-out: 6155,2735 6160,2740 6160,2760 6155,2765 6085,2765 6045,2805 6045,2960 6040,2965 5910,2965 5900,2955 5900,2685 5910,2675 6035,2675 6040,2680 6040,2705 6050,2715 6090,2715 6110,2735

## Silkscreen, mask and mechanical layers (free items; w line width, h text height)
Top Overlay:
  text "GND" at 5890,3530 h32
  text "GND" at 4185,3510 h32
  text "GND" at 5175,3485 h32
  text "+5" at 5290,3485 h32
  text "+5" at 5380,3485 h32
  text "MOSI" at 5465,3485 h32
  text "CS" at 5600,3485 h32
  text "SCK" at 5690,3485 h32
  text "MISO" at 5795,3485 h32
  text "SWO" at 4380,3480 h32
  text "NRST" at 4490,3480 h32
  text "TMS" at 4625,3480 h32
  text "GND" at 4730,3480 h32
  text "TCK" at 4835,3480 h32
  text "VDD" at 4945,3480 h32
  text "+3.3" at 4160,3445 h32
  text "+5" at 5955,3315 h32 r90
  text "Standoff" at 6050,3285 h32
  text "Standoff" at 3690,3255 h32
  text "GND" at 3740,3130 h32
  text "A" at 5365,2125 h400
  text "GND" at 3985,2100 h32
  text "Standoff" at 5860,1460 h32
Bottom Overlay:
  text "+24V" at 6400,3150 h32
  text "+24V" at 6740,3090 h32
  text "GND" at 6390,3040 h32
  text "GND" at 6710,2990 h32
  text "GND" at 6390,2930 h32
  text "UART_RX" at 6840,2875 h32
  text "UART_TX" at 6390,2820 h32
  text "GND" at 6715,2770 h32
  text "I2C_SCL" at 6395,2715 h32
  text "I2C_SDA" at 6835,2660 h32
  text "GND" at 6390,2600 h32
  text "PGOOD" at 6765,2555 h32
  text "PGOOD" at 6390,2490 h32
  text "MOTOR_EN" at 6865,2440 h32
  text "MOTOR_EN" at 6390,2385 h32
  text "GND" at 6705,2340 h32
  text "Extra" at 6390,2275 h32
  text "+5V" at 6705,2220 h32
  text "PGOOD" at 6390,2175 h32
  text "+5V" at 6705,2110 h32
  text "Motor 2" at 6390,2055 h32
  text "GND" at 6705,2010 h32
  text "Motor 1" at 6390,1930 h32
  text "Battery" at 6830,1905 h32
  text "GND" at 6390,1840 h32
Mechanical 1:
  the board outline again, w10

## Text inside footprints (layer, text, board x,y; h text height)
C7: Top Overlay "+" at 6070,3110 h32 r180
J1: Top Overlay "1" at 6325,3170 h32 r270; Top Overlay "13" at 6313.23,1904.04 h32 r270; Top Overlay "14" at 6687.24,3154.09 h32 r270; Top Overlay "25" at 6687.24,1963.31 h32 r270